# Altium PCB WirelessAudioSpeaker.PcbDoc (part 1 of 2)
Units mm, origin at the board's own origin, x right, y up, seen from the top; angles counter-clockwise.
Board outline 50.68 x 47.13 mm, 2 copper layers (Top Layer, Bottom Layer); 94 components, 57 nets, 349 pads, 621 vias.
Unrouted connection lines stored in the file: 2.
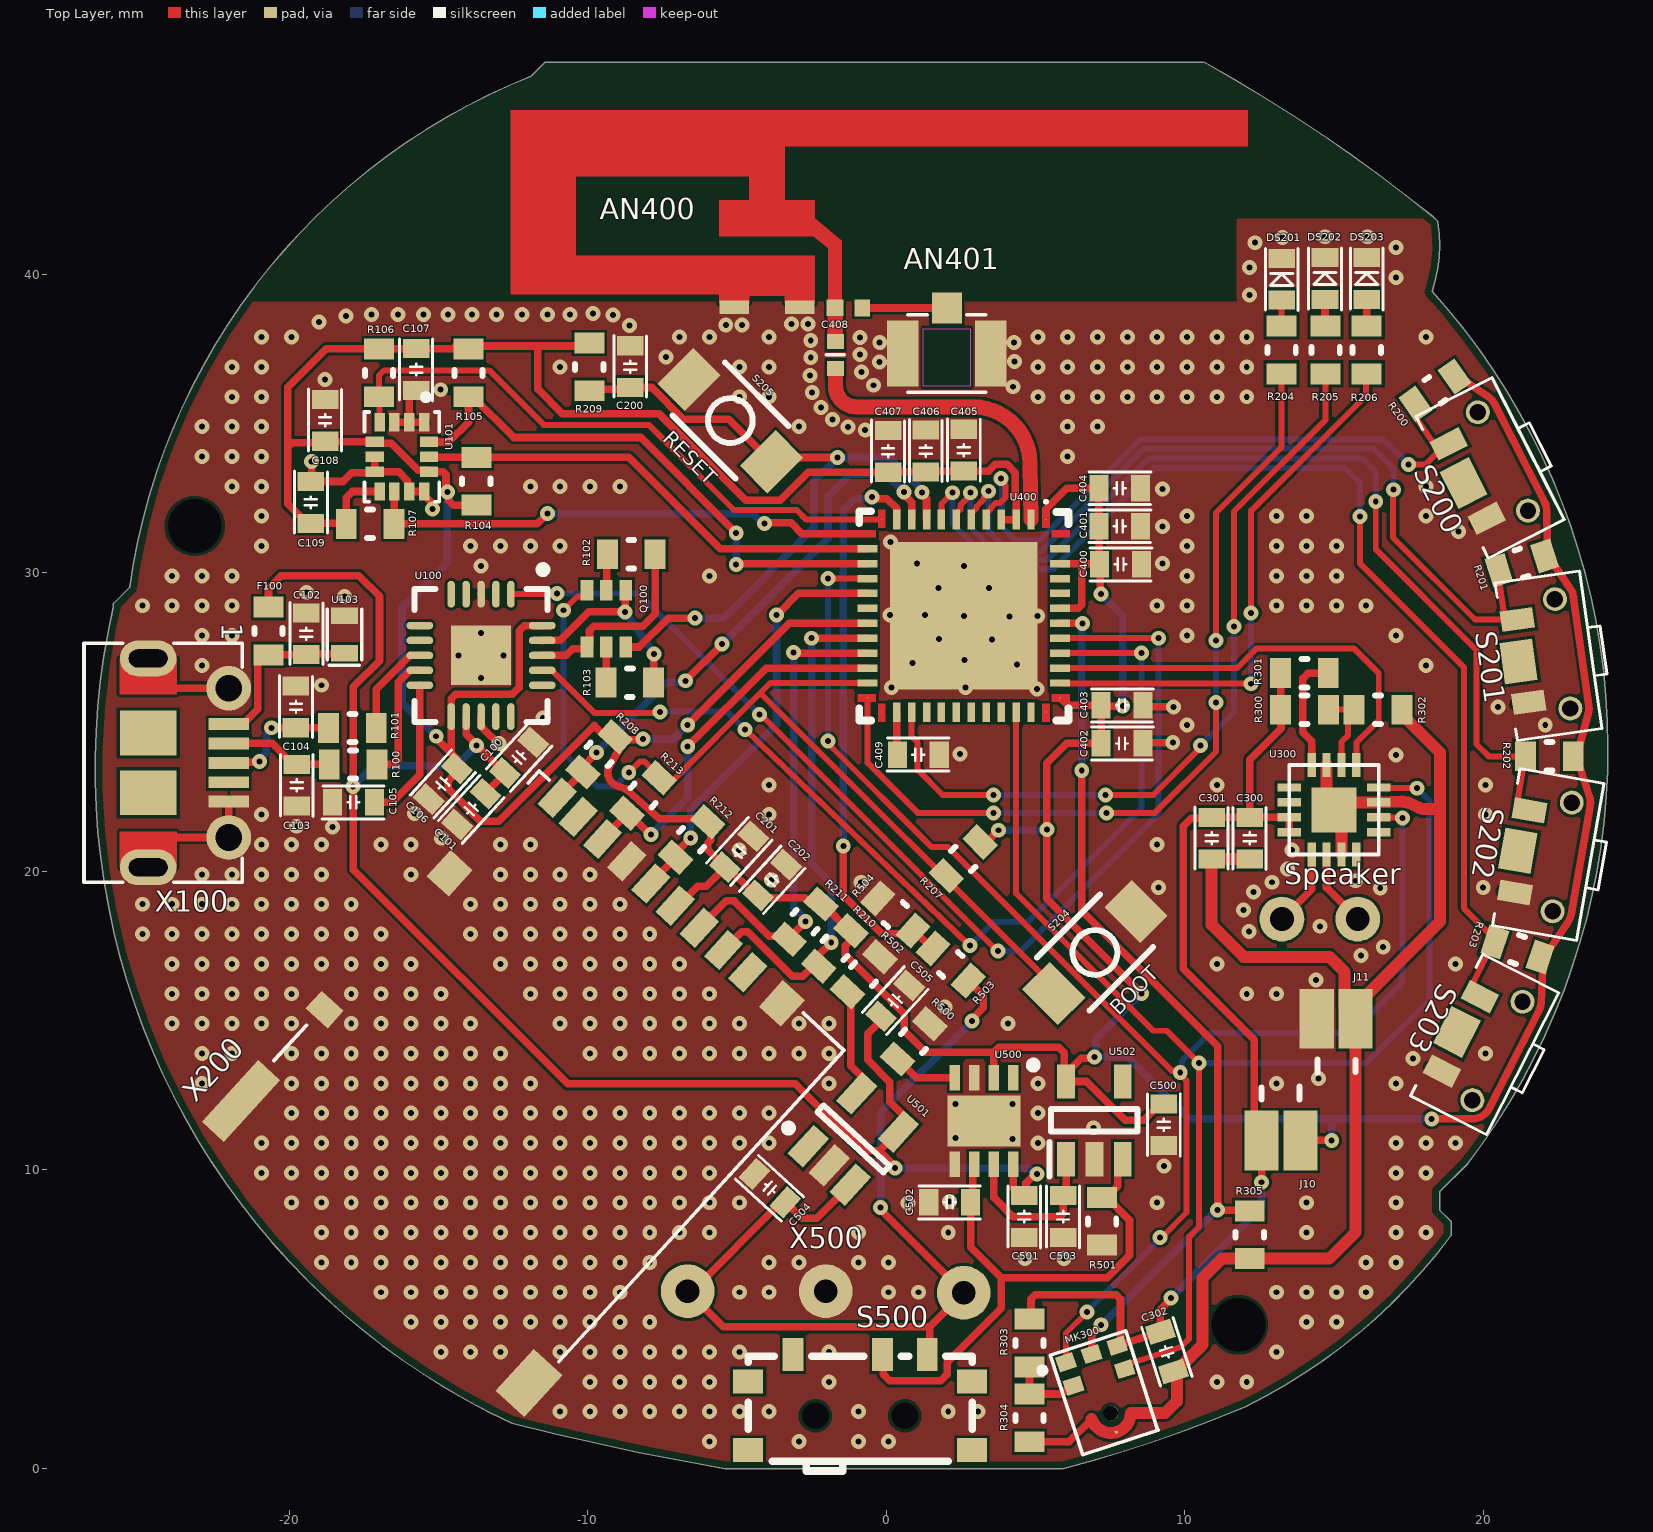
[diagram p0: Top Layer view]
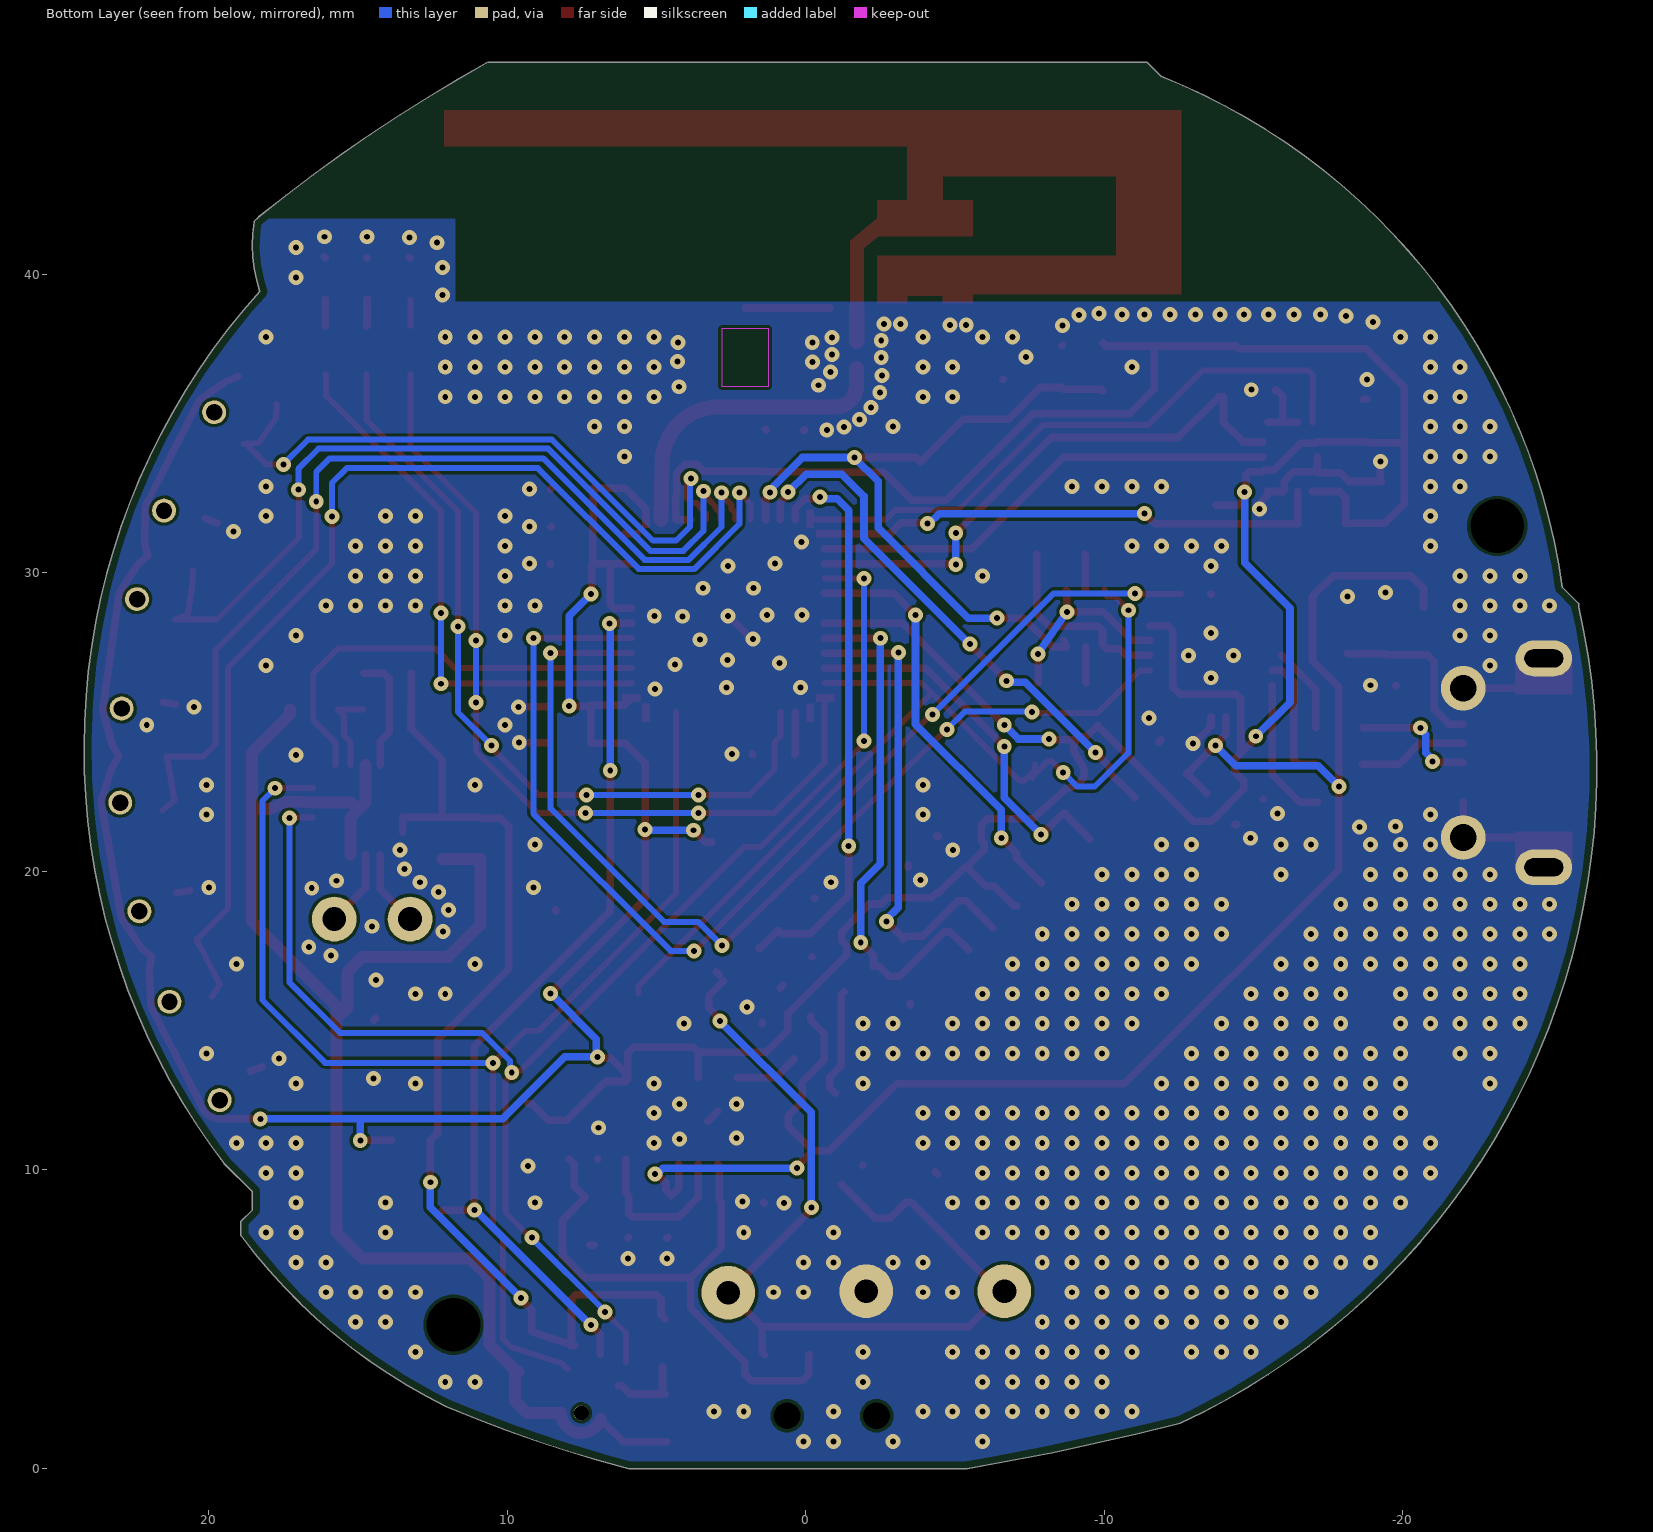
[diagram p1: Bottom Layer view, seen from below]

## Layer stack, top to bottom
Top Solder: solder mask 0.0102, Solder Resist, Dk 3.5
Top Layer: signal copper 0.0356
Dielectric 1: dielectric 0.32, FR-4, Dk 4.8
Bottom Layer: signal copper 0.0356
Bottom Solder: solder mask 0.0102, Solder Resist, Dk 3.5

## Board outline
-12.543,1.496 ccw(c11.581,97.271) -5.4,-0.025 5.926,-0.025 ccw(c-5.542,43.676) 12.038,2.056 ccw(c3.6,19.193) 18.921,7.785 18.921,8.267 18.54,8.648 18.54,9.258 19.48,10.198 ccw(c1.294,24.091) 18.291,39.417 ccw(c13.46,40.982) 18.48,41.747 18.48,41.762 18.327,41.916 ccw(c-15.774,-0.315) 10.641,47.104 -11.423,47.104 -11.906,46.621 ccw(c-3.914,26.504) -25.351,29.502 -25.889,28.964 -25.889,28.846 ccw(c-2.288,23.431)

## Design rules (kind name [scope] priority, off if disabled: settings)
BoardOutlineClearance [All] p1: gap=0.254 ignorepadtopadclearanceinfootprint=FALSE
Clearance [All] p1: gap=0.1 ignorepadtopadclearanceinfootprint=FALSE
HoleSize [All] p1: absolutevalues=TRUE maxlimit=6 minlimit=0.2 maxpercent=80.000 minpercent=20.000
PolygonConnect [All] p1: connectstyle=Direct reliefconductorwidth=0.254 reliefentries=4 polygonreliefangle="90 Angle" airgapwidth=0.254
RoutingVias [All] p1: holewidth=0.2 width=0.5 viastyle="Through Hole" minholewidth=0.2 minwidth=0.4 maxholewidth=0.5 maxwidth=0.7
SilkToSilkClearance [All] p1: silktosilkclearance=0.15
SilkToSolderMaskClearance [IsPad] p1: minsilkscreentomaskgap=0.15 clearancetoexposedcopper=TRUE
SolderMaskExpansion [All] p1: expansion=0.075 istentingtop=FALSE
Width [All] p1: maxlimit=20 minlimit=0.175 preferedwidth=0.254
27 further rules are at their usual default settings.

## Classes and differential pairs
component class U_USB_UART_IMU: C100 C101 C102 C103 C104 C105 C106 C107 C108 C109 F100 Q100 R100 R101 R102 R103 R104 R105 R106 R107 U100 U101 U103 X100
component class SoC: AN400 AN401 C400 C401 C402 C403 C404 C405 C406 C407 C408 C409 U400
component class Power: C500 C501 C502 C503 C504 C505 J10 J11 R500 R501 R502 R503 R504 S500 U500 U501 U502 X500
component class Analog: C300 C301 C302 MK300 R300 R301 R302 R303 R304 R305 Speaker U300
component class IO: C200 C201 C202 DS201 DS202 DS203 R200 R201 R202 R203 R204 R205 R206 R207 R208 R209 R210 R211 R212 R213 S200 S201 S202 S203 S204 S205 X200

## Components (designator, comment, footprint, x,y, rotation, side; value= is the part's Value field where it differs from the comment)
AN400 "PCB-Antenna" ESP32-PCB-Antenna -5.105,38.887 r0 top locked
AN401 "AN-U.FL-R-SMT-1(10)" HRS_U.FL-R-SMT-1(10) 2.032,37.338 r180 top locked
C100 "100nF" C-0603 -12.3,23.8 r227.5 top
C101 "100nF" C-0603 -13.9,22.075 r47.5 top
C102 "100nF" C-0603 -19.425,27.95 r270 top
C103 "100nF" C-0603 -19.75,22.875 r90 top
C104 "100nF" C-0603 -19.775,25.5 r270 top
C105 "100nF" C-0603 -17.85,22.3 r0 top
C106 "100nF" C-0603 -14.85,22.925 r47.5 top
C107 "100nF" C-0603 -15.75,36.8 r90 top
C108 "100nF" C-0603 -18.8,35.1 r270 top
C109 "100nF" C-0603 -19.275,32.35 r270 top
C200 "100nF" C-0603 -8.575,36.9 r270 top
C201 "100nF" C-0603 -4.925,20.65 r227.5 top
C202 "100nF" C-0603 -3.825,19.7 r227.5 top
C300 "100nF" C-0603 12.175,21.1 r90 top
C301 "100nF" C-0603 10.9,21.1 r270 top
C302 "100nF" C-0603 9.4,3.9 r108 top
C400 "100nF" C-0603 7.85,30.275 r180 top
C401 "100nF" C-0603 7.825,31.55 r180 top
C402 "100nF" C-0603 7.9,24.275 r180 top
C403 "100nF" C-0603 7.9,25.55 r180 top
C404 "100nF" C-0603 7.825,32.825 r180 top
C405 "100nF" C-0603 2.6,34.1 r270 top
C406 "100nF" C-0603 1.325,34.075 r270 top
C407 "100nF" C-0603 0.061,34.06 r270 top
C408 "100nF" C-0402 -1.7,37.29 r90 top
C409 "100nF" C-0603 1.075,23.9 r0 top
C500 "100nF" C-0603 9.3,11.5 r90 top
C501 "100nF" C-0603 4.625,8.425 r90 top
C502 "100nF" C-0603 2.125,8.9 r0 top
C503 "100nF" C-0603 5.925,8.425 r90 top
C504 "100nF" C-0603 -3.9,9.375 r317.5 top
C505 "100nF" C-0603 0.3,15.65 r227.5 top
DS201 "150060BS75000" LED-0603-BLUE 13.25,39.825 r90 top value=Blue
DS202 "150060BS75000" LED-0603-BLUE 14.7,39.85 r90 top value=Blue
DS203 "150060BS75000" LED-0603-BLUE 16.1,39.85 r90 top value=Blue
F100 "SF-0603F050-2" SMD-0603 -20.675,28.05 r90 top
J10 "2 way net solder junction - Normally Open" 2waySolder_NO 13.225,10.975 r180 top
J11 "2 way net solder junction - Normally Open" 2waySolder_NO 15.075,15.05 r0 top
MK300 "ICS-43434" MK-ICS-43434 7.3,2.525 r18 top locked
Q100 "BC847BS" SOT-23-6 -9.375,28.457 r270 top
R100 "27E" R-0603 -17.85,23.55 r0 top
R101 "27E" R-0603 -17.875,24.775 r0 top
R102 "27E" R-0603 -8.55,30.632 r180 top
R103 "27E" R-0603 -8.6,26.332 r180 top
R104 "27E" R-0603 -13.75,33.05 r270 top
R105 "27E" R-0603 -13.975,36.7 r90 top
R106 "27E" R-0603 -16.975,36.7 r90 top
R107 "27E" R-0603 -17.3,31.65 r180 top
R200 "27E" R-0603 18.4,36.1 r35 top
R201 "27E" R-0603 21.3,30.3 r17.5 top
R202 "27E" R-0603 22.225,23.825 r0 top
R203 "27E" R-0603 21.15,17.35 r341.5 top
R204 "27E" R-0603 13.225,37.45 r270 top
R205 "27E" R-0603 14.7,37.45 r270 top
R206 "27E" R-0603 16.075,37.45 r270 top
R207 "27E" R-0603 2.6,20.4 r45 top
R208 "27E" R-0603 -9.6,23.9 r47.5 top
R209 "27E" R-0603 -9.925,36.9 r90 top
R210 "27E" R-0603 -1.7,17.4 r47.5 top
R211 "27E" R-0603 -2.7,18.3 r47.5 top
R212 "27E" R-0603 -6.5,21.05 r47.5 top
R213 "27E" R-0603 -8.125,22.525 r47.5 top
R300 "27E" R-0603 14.005,25.425 r180 top
R301 "27E" R-0603 14,26.65 r180 top
R302 "27E" R-0603 16.465,25.425 r180 top
R303 "27E" R-0603 4.82,4.2 r90 top
R304 "27E" R-0603 4.82,1.69 r90 top
R305 "27E" R-0603 12.2,7.825 r90 top
R500 "27E" R-0603 0.9,14.3 r227.5 top
R501 "27E" R-0603 7.25,8.275 r90 top
R502 "27E" R-0603 -0.775,16.55 r227.5 top
R503 "27E" R-0603 2.15,16.85 r317.5 top
R504 "27E" R-0603 0.3,18.525 r317.51 top
S200 "SKTDLDE010" S-SKTDLDE010 20.658,33.722 r117 top locked
S201 "SKTDLDE010" S-SKTDLDE010 22.659,27.277 r98 top locked
S202 "SKTDLDE010" S-SKTDLDE010 22.644,20.472 r80 top locked
S203 "SKTDLDE010" S-SKTDLDE010 20.475,13.975 r63 top locked
S204 "B3U-100P" S-B3U-100X 7,17.275 r45 top
S205 "B3U-100P" S-B3U-100X -5.225,35.1 r135 top
S500 "MLL1200S" S-MLL1200S -0.875,1.75 r0 top locked
Speaker "Speaker" A-Speaker-Connector 14.525,18.392 r0 top locked
U100 "FT231XQ-R" QFN-20-M -13.575,27.225 r270 top
U101 "ICM-40627" LGA-14 -16.225,33.875 r270 top
U103 "ESDA7P120-1U1M" ESD_QFN1610_2N_1K_2A -18.15,27.925 r90 top
U300 "MAX98357A" QFN16-3MM 15,22.05 r270 top
U400 "U-ESP32-PICO-V3" ESP32PICOV3 2.6,28.55 r270 top
U500 "TPS2115ADRBR" SON65P300X300X100-9N-D 3.275,11.625 r270 top
U501 "MCP73832T-2DCI_OT" SOT-23-5 -1.1,11.025 r47.5 top
U502 "AP7347DQ-33W5-7" SOT95P280X145-5N 6.975,11.65 r90 top
X100 "X-MicroUSB" Micro-USB -26.175,23.625 r270 top locked
X200 "X-DM3AT-SF-PEJM5" X-DM3AT-SF-PEJM5 -7,18.775 r317.5 top locked
X500 "Battery" Battery -2.025,5.9 r0 top locked

## Footprints (in the part's own frame and the unit in brackets; to place one, negate y for a bottom-side part, rotate by r counter-clockwise, add the part's x,y. Pads: shape width x height; smd on the part's side, far side on the other; paste and mask are expansions set on the pad)
2waySolder_NO [mm] "2 way net solder junction - Normally Open"
  rect 1.143x2 smd paste-1.016: 1(-0.65,0) 2(0.65,0)
  silkscreen extent -0.62,-1.8 0.65,-1.37
A-Speaker-Connector [mm] "Solderpads for Speaker"
  round 1.5 hole 0.8: 1(-1.27,0) 2(1.27,0)
Battery [mm]
  round 1.8 hole 0.8: 1(-4.627,0.025) 2(-0.002,0.025) 3(4.623,-0.025)
C-0402 [mm]
  rect 0.51x0.56 smd mask+0.05: 1(-0.45,0) 2(0.45,0)
  silkscreen extent 0,-0.3 0,0.3, body extent -0.5,-0.3 0.5,0.3, height 0.4
C-0603 [mm]
  rect 0.64x0.89 smd mask+0.05: 1(-0.7,0) 2(0.7,0)
  silkscreen extent -1.05,-0.55 1.02,0.55, body extent -0.9,-0.5 0.9,0.5, height 1.4
ESD_QFN1610_2N_1K_2A [mm]
  rect 0.55x0.9 smd mask+0.05: 1(-0.625,0) 2(0.625,0)
  silkscreen extent -1.02,-0.58 0.85,0.58, body extent -0.8,-0.49 0.8,0.49, height 0.61
ESP32-PCB-Antenna [mm]
  rect 0.56x0.56 smd mask+0.05: ANT1(3.392,-0.014)
  rect 0.51x0.56 smd mask+0.05: ANT2(4.304,-0.025)
  rect 1x0.46 smd: GND(0.012,0) GND(2.21,0)
  Top Layer region: 3.16,-0.014 3.16,1.974 2.66,2.384 -0.49,2.384 -0.49,3.594 0.51,3.594 0.51,4.394 -5.29,4.394 -5.29,1.724 2.71,1.724 2.71,0.127 1.71,0.127 1.71,0.394 0.51,0.394 0.51,0.127 -0.49,0.127 -0.49,0.434 -7.47,0.434 -7.47,6.604 17.221,6.604 17.221,5.394 1.71,5.394 1.71,3.594 2.71,3.594 2.71,2.984 3.62,2.224 3.62,-0.014
ESP32PICOV3 [mm]
  round 0.025 smd: 1(-3.225,2.75) 12(-3.225,-2.75) 13(-2.75,-3.225) 24(2.75,-3.225) 25(3.225,-2.75) 36(3.225,2.75) 37(2.75,3.225) 48(-2.75,3.225)
  rect 0.66x0.25 smd: 2(-3.225,2.25) 3(-3.225,1.75) 4(-3.225,1.25) 5(-3.225,0.75) 6(-3.225,0.25) 7(-3.225,-0.25) 8(-3.225,-0.75) 9(-3.225,-1.25) 10(-3.225,-1.75) 11(-3.225,-2.25) 26(3.225,-2.25) 27(3.225,-1.75) 28(3.225,-1.25) 29(3.225,-0.75) 30(3.225,-0.25) 31(3.225,0.25) 32(3.225,0.75) 33(3.225,1.25) 34(3.225,1.75) 35(3.225,2.25)
  rect 0.25x0.66 smd: 14(-2.25,-3.225) 15(-1.75,-3.225) 16(-1.25,-3.225) 17(-0.75,-3.225) 18(-0.25,-3.225) 19(0.25,-3.225) 20(0.75,-3.225) 21(1.25,-3.225) 22(1.75,-3.225) 23(2.25,-3.225) 38(2.25,3.225) 39(1.75,3.225) 40(1.25,3.225) 41(0.75,3.225) 42(0.25,3.225) 43(-0.25,3.225) 44(-0.75,3.225) 45(-1.25,3.225) 46(-1.75,3.225) 47(-2.25,3.225)
  rect 4.95x4.95 smd: 49(0,0)
  Top Layer region: -3.555,2.625 -3.555,2.875 -2.946,2.875 -2.946,2.625
  Top Layer region: -3.555,-2.875 -3.555,-2.625 -2.946,-2.625 -2.946,-2.875
  Top Layer region: -2.875,-3.555 -2.875,-2.946 -2.625,-2.946 -2.625,-3.555
  Top Layer region: 2.625,-3.555 2.625,-2.946 2.875,-2.946 2.875,-3.555
  Top Layer region: 2.946,-2.875 2.946,-2.625 3.555,-2.625 3.555,-2.875
  Top Layer region: 2.946,2.625 2.946,2.875 3.555,2.875 3.555,2.625
  Top Layer region: 2.625,2.946 2.625,3.555 2.875,3.555 2.875,2.946
  Top Layer region: -2.875,2.946 -2.875,3.555 -2.625,3.555 -2.625,2.946
  silkscreen extent -3.87,-3.51 3.51,3.51, body extent -3.5,-3.5 3.5,3.5, height 1.14
HRS_U.FL-R-SMT-1(10) [mm]
  rect 1.05x2.2 smd: 1(-1.475,0) 3(1.475,0)
  rect 1x1.05 smd: 2(0,-1.525)
  Keep-Out Layer region: 0.787,-0.838 -0.787,-0.838 -0.787,1.1 0.787,1.1
  silkscreen extent -1.3,-1.3 1.3,1.3, body extent -1.47,-1.52 1.53,1.58, height 1.26
LED-0603-BLUE [mm]
  rect 0.64x0.89 smd mask+0.05: A(-0.7,0) K(0.7,0)
  silkscreen extent -1.05,-0.55 1.03,0.55, body extent -0.8,-0.4 0.8,0.4, height 0.4
LGA-14 [mm]
  rect 0.61x0.35 smd: 1(-1.16,0.75) 2(-1.16,0.25) 3(-1.16,-0.25) 4(-1.16,-0.75) 8(1.16,-0.75) 9(1.16,-0.25) 10(1.16,0.25) 11(1.16,0.75)
  rect 0.35x0.61 smd: 5(-0.5,-0.91) 6(0,-0.91) 7(0.5,-0.91) 12(0.5,0.91) 13(0,0.91) 14(-0.5,0.91)
  silkscreen extent -2.1,-1.25 1.5,1.25, body extent -1.5,-1.25 1.5,1.25, height 0.95
Micro-USB [mm]
  rect 0.4x1.35 smd mask+0.05: 1(-1.3,4.15) 2(-0.65,4.15) 3(0,4.15) 4(0.65,4.15) 5(1.3,4.15)
  round 1.5 hole 0.9 mask+0.05: 6(-2.5,4.15) 7(2.5,4.15)
  oval 1.2x1.9 hole 0.6 slot 1.3 at 90 deg mask+0.05: 8(3.5,1.45) 9(-3.5,1.45)
  rect 1.5x1.9 smd mask+0.05: 10(-1,1.45) 11(1,1.45)
  Top Layer region: -3.5,2.4 -2.3,2.4 -2.3,0.5 -3.5,0.5 -3.5,2.4
  Top Layer region: 2.3,2.4 3.5,2.4 3.5,0.5 2.3,0.5 2.3,2.4
  silkscreen extent -4,-0.7 4,4.6, body extent -4.1,-1.15 4.1,4.66, height 2.9
MK-ICS-43434 [mm]
  rect 0.6x0.522 smd paste-1: 1(-0.9,1.361) 2(-0.9,0.539) 4(0.9,0.539) 5(0.9,1.361) 6(0,1.361)
  rect 0.1x0.1 smd paste-1 mask+0: 3(-0.016,-1.383)
  round 0.5 hole 0.5 unplated: ""(0,-0.713)
  Top Layer lines w0.4: -0.671,-0.711 ccw(c0,-0.713) 0.638,-0.92
  silkscreen extent -1.84,-1.75 1.33,1.75, body extent -1.22,-1.79 1.19,1.79, height 0.4
QFN16-3MM [mil] "QFN16_3MM"
  rect 31.5x11.02 smd mask-15.75: 1(-59.06,29.53) 2(-59.06,9.84) 3(-59.06,-9.84) 4(-59.06,-29.53) 9(59.06,-29.53) 10(59.06,-9.84) 11(59.06,9.84) 12(59.06,29.53)
  rect 11.02x31.5 smd mask-15.75: 5(-29.53,-59.06) 6(-9.84,-59.06) 7(9.84,-59.06) 8(29.53,-59.06) 13(29.53,59.06) 14(9.84,59.06) 15(-9.84,59.06) 16(-29.53,59.06)
  rect 59.06x59.06 smd paste-29.53: THERMAL(0,0)
  silkscreen extent -59,-59 59,59, body extent -59,-59 59,59, height 35
QFN-20-M [mm] "QFN, 20-Leads, Body 4x4mm, Pitch 0.5mm, Thermal Pad 2x2mm, IPC Medium Density"
  oval 0.9x0.25 smd: 1(-2.05,1) 2(-2.05,0.5) 3(-2.05,0) 4(-2.05,-0.5) 5(-2.05,-1) 11(2.05,-1) 12(2.05,-0.5) 13(2.05,0) 14(2.05,0.5) 15(2.05,1)
  oval 0.25x0.9 smd: 6(-1,-2.05) 7(-0.5,-2.05) 8(0,-2.05) 9(0.5,-2.05) 10(1,-2.05) 16(1,2.05) 17(0.5,2.05) 18(0,2.05) 19(-0.5,2.05) 20(-1,2.05)
  rect 2x2 smd paste-1: 21(0,0)
  silkscreen extent -3,-2.22 2.22,2.23, body extent -2.08,-2.07 2.07,2.08, height 0.8
R-0603 [mm]
  rect 0.7x1 smd: 1(-0.809,0.019) 2(0.791,0.019)
  silkscreen extent -0.11,-0.46 0.09,0.49, body extent -0.88,-0.46 0.87,0.49, height 0.54
S-B3U-100X [mm]
  rect 1.3x1.7 smd: 1(-1.958,0.004) 2(1.942,0.004)
  silkscreen extent -1.51,-1.25 1.49,1.25, body extent -2.01,-1.25 1.99,1.25, height 1.61
S-MLL1200S [mm]
  rect 1x0.8 smd: 0(-3.75,-1.15) 0(-3.75,1.15) 0(3.75,-1.15) 0(3.75,1.15)
  round 0 hole 0.9: 0(-1.5,0) 0(1.5,0)
  rect 0.7x1.1 smd: 1(-2.25,2.05) 2(0.75,2.05) 3(2.25,2.05)
  silkscreen extent -3.75,-1.85 3.75,2, body extent -3.85,-2.85 3.85,2.25, height 1.5
S-SKTDLDE010 [mm]
  round 0.8 hole 0.55: 0(-1.85,-0.002) 0(1.85,-0.002)
  rect 0.7x1.1 smd: 1(-1.45,1.348) 2(1.35,1.348)
  rect 1.4x1.1 smd: 3(-0.05,1.498)
  silkscreen extent -2.67,-1.38 2.67,1.91, body extent -2.16,-0.89 2.03,2.03, height 1.55
SMD-0603 [mm]
  rect 0.7x1 smd: 1(-0.809,0.019) 2(0.791,0.019)
  silkscreen extent -0.11,-0.46 0.09,0.49, body extent -0.88,-0.46 0.87,0.49, height 0.54
SON65P300X300X100-9N-D [mm]
  rect 0.85x0.35 smd: 1(-1.45,0.975) 2(-1.45,0.325) 3(-1.45,-0.325) 4(-1.45,-0.975) 5(1.45,-0.975) 6(1.45,-0.325) 7(1.45,0.325) 8(1.45,0.975)
  rect 1.7x2.45 smd: 9(0,0)
  silkscreen extent -2,1.53 -1.75,1.78, body extent -1.5,-1.5 1.5,1.5, height 0.77
SOT95P280X145-5N [mm]
  rect 1.15x0.6 smd: 1(-1.3,0.95) 2(-1.3,0) 3(-1.3,-0.95) 4(1.3,-0.95) 5(1.3,0.95)
  silkscreen extent -1.88,-1.45 0.38,1.5, body extent -1.4,-1.45 1.4,1.45, height 1.45
SOT-23-5 [mm] "MCP73831"
  rect 1.3x0.7 smd: 1(-1.2,0.95) 2(-1.2,0) 3(-1.2,-0.95) 4(1.2,-0.95) 5(1.2,0.95)
  silkscreen extent -1.32,-1.5 0.15,1.97, body extent -1.6,-1.5 1.6,1.5, height 0.92
SOT-23-6 [mm]
  rect 0.7x0.42 smd: 1(-0.95,0.65) 2(-0.95,0) 3(-0.95,-0.65) 4(0.95,-0.65) 5(0.95,0) 6(0.95,0.65)
  body extent -1.2,-1.1 1.2,1.1, height 1.1
X-DM3AT-SF-PEJM5 [mm] "MicroUSB"
  rect 0.7x1.2 smd: 1(3.2,0) 2(2.1,0) 3(1,0) 4(-0.1,0) 5(-1.2,0) 6(-2.3,0) 7(-3.4,0) 8(-4.5,0) 9(-5.45,0)
  rect 1x0.8 smd: 10(-6.4,-10.5)
  rect 1x1.2 smd: S(-6.4,-4.3) S(4.75,0)
  rect 1x2.8 smd: S(-6.4,-14.65)
  rect 1.3x1.9 smd: S(7.1,-15.1)
  silkscreen extent -6.5,-13.9 7.35,0.25, body extent -6.54,-15.9 7.31,0.25, height 1.68

## Part data
AN400: library part AN-ESP32-PCB-Antenna, "PCB, 2.4 GHz Antenna", Manufacturer=BFH, Added=28.08.2018, ComponentLink1Description="Antenna for ESP32", Order_Code="PCB 2.4 GHz Antenna", Part-Number="PCB 2.4 GHz Antenna", Price (CHF)=0.0
AN401: "U.FL _UMCC_ Connector Receptacle, Male Pin 50Ohm Surface Mount Solder", Manufacturer=Hirose, Mfr. Part No.=U.FL-R-SMT-1(10), Package=None, Distributor=Mouser, Order-Code=798-U.FL-R-SMT-110, SnapEDA_Link=https://www.snapeda.com/parts/U.FL-R-SMT-1%2810%29/Hirose%20Electric%20Co%20Ltd/view-part/55192/?ref=snap
C100 C101 C102 C103 C104 C105 C106 C107 C108 C109 C200 C201 C202 C300 C301 C302 C400 C401 C402 C403 C404 C405 C406 C407 C409 C500 C501 C502 C503 C504 C505: library part C-SMD-0603, "Multilayer Ceramic Capacitors MLCC", Manufacturer="Murata Electronics", Mfr. Part No.=GRM18..., Package=0603, Added=28.08.2018, ComponentLink1Description="Chip Multilayer Ceramic Capacitors", ComponentLink1URL=https://www.mouser.ch/datasheet/2/281/murata_03052018_GRM_Series_1-1310166.pdf, Distributor=Mouser, Mounting Style=SMD/SMT, Notice=-, Order-Code=81-GRM18..., Price (CHF)=0.12
C408: library part C-SMD-0402, "Multilayer Ceramic Capacitors MLCC", Manufacturer="Murata Electronics", Mfr. Part No.=GRM02*, Package=0402, Added=28.08.2018, ComponentLink1Description="Chip Multilayer Ceramic Capacitors", ComponentLink1URL=https://www.mouser.ch/datasheet/2/281/murata_03052018_GRM_Series_1-1310166.pdf, Distributor=Mouser, Mounting Style=SMD/SMT, Notice=-, Order-Code=81-GRM02..., Price (CHF)=0.12
DS201 DS202 DS203: library part DS-LED-BLUE, "Standard LEDs - SMD 0603 Blue", Manufacturer="Wurth Elektronik", Package=0603, Added=06.08.2021, Distributor=Mouser, Mfr. Part No.=150060BS75000, Mounting Style=SMD/SMT, Notice=-, Order-Code=710-150060BS75000, Price (CHF)=0.105
F100: library part F-0603F050-2, "Surface Mount Fuses 0.5A Fast Acting", Manufacturer=Bourns, Package=0603, Added=02.02.2017, ComponentLink1Description="Mouser Datasheet", ComponentLink1URL=https://www.mouser.ch/datasheet/2/54/f0603f-778085.pdf, Distributor=Mouser, Mfr. Part No.=SF-0603F050-2, Mounting Style=SMD/SMT, Notice=-, Order-Code=652-SF-0603F050-2, Price (CHF)=0.542
J10 J11: library part 2waySolderNO, ComponentLink1Description=Source, ComponentLink1URL=http://www.edatools.cz/addons
MK300: library part MK-ICS-43434, "Microphone MEMS / 60Hz ~ 20kHz Digital, I²S", Manufacturer="TDK InvenSense", Added=16.09.2020, Distributor=Mouser, Mfr. Part No.=ICS-43434, Mounting Style=SMD/SMT, Notice=-, Order-Code=410-ICS-43434, Pckage=SMD/SMT, Price (CHF)=2.64
Q100: library part Q-BC847BS, "Bipolares Transistor-Array, Universal, NPN, 45 V, 250 mW, 100 mA, 200 hFE, SC-88", Manufacturer="Diodes Incorporated", Mfr. Part No.=BC847BS-7-F, Package=SOT-23-6, Added=28.08.2018, ComponentLink1Description="DUAL NPN SMALL SIGNAL SURFACE MOUNT TRANSISTOR", ComponentLink1URL=https://www.mouser.ch/datasheet/2/115/ds30222-71055.pdf, Distributor=Mouser, Mounting Style=SMD/SMT, Notice=-, Order-Code=621-BC847BS-7-F, Price (CHF)=0.23
R100 R101 R102 R103 R104 R105 R106 R107 R200 R201 R202 R203 R204 R205 R206 R207 R208 R209 R210 R211 R212 R213 R300 R301 R302 R303 R304 R305 R500 R501 R502 R503 R504: library part R-SMD-0603, "Thin Film Resistors - SMD  0.1W  1%", Manufacturer="Vishay / Beyschlag", Mfr. Part No.=MCU08050C*, Package=0603, Added=10.11.2012, Distributor=Mouser, Mounting Style=SMD/SMT, Notice=-, Order-Code=BFH-Lager, Price (CHF)=0.1
S200 S201 S202 S203: library part S-Tactile-Switch, "Tactile Switches 6x6 Flat 4.3mm Btn Force 100g w/o Grd", Manufacturer=ALPS, Package="LxWxH 3.9x2.9x1.55mm", Added=28.08.2018, ComponentLink1Description="Tactile Switch", ComponentLink1URL=http://www.farnell.com/datasheets/2082873.pdf?_ga=2.143512053.1712594784.1535524557-997716388.1524486210, Distributor=Mouser, Mfr. Part No.=SKTDLDE010, Mounting Style=SMD/SMT, Notice=-, Order-Code=688-SKTDLDE010, Price (CHF)=0.43
S204 S205: library part S-B3U-100P, "Tactile Switches Top Actuated w/o boss w/o ground", Manufacturer="OMRON ELECTRONIC COMPONENTS", Mfr. Part No.=B3U-1000P, Package=2.5x3mm, Added=28.08.2018, ComponentLink1Description="Ultra-small Tactile Switch (SMT)", ComponentLink1URL=http://www.farnell.com/datasheets/2610940.pdf?_ga=2.224737754.1712594784.1535524557-997716388.1524486210, Distributor=Mouser, Mounting Style=SMD/SMT, Notice=-, Order-Code=653-B3U-1000P, Price (CHF)=0.772
S500: library part S-Slide-Switch, "Slide Switch SPDT RA SMT MLL1200S", Manufacturer="TE Connectivity", Package=SMD/SMT, Added=08.10.2018, Datasheet Link=https://www.te.com/commerce/DocumentDelivery/DDEController?Action=srchrtrv&DocNm=1437575-1&DocType=Customer+Drawing&DocLang=English&DocFormat=pdf&PartCntxt=1437575-1, Distributor=Mouser, Mfr. Part. Nr.=MLL1200S, Mounting Style=SMD/SMT, Notice=-, Order-Code=506-MLL1200S, Price (CHF)=2.27
Speaker: library part A_Speaker, "Speaker, 3W 8 Ohm"
U100: library part U-FT231XQ-R, "USB Interface IC USB to Full Serial UART", Package=QFN-20, Added=10.08.2021, Code_JEDEC=MO-220WGGD-1, ComponentLink1Description="Manufacturer URL", ComponentLink1URL=http://www.ftdichip.com/, ComponentLink2Description=Datasheet, ComponentLink2URL=http://www.ftdichip.com/Support/Documents/DataSheets/ICs/DS_FT231X.pdf, ComponentLink3Description="FT231X Product Page", ComponentLink3URL=www.ftdichip.com/Products/ICs/FT231X.html, DatasheetVersion="ver 1.0, Feb-2012", Distributor=Mouser, Mfr. Part No.=FT231XQ-R, Mounting Style=SMD/SMT, Notice=-, Order-Code=895-FT231XQ-R, PackageDescription="20-Pin Quad Flat No-Lead, 4 x 4 mm Body, 0.5 mm Pitch", PackageReference=QFN-20, PackageVersion=Feb-2012
U101: library part U-ICM-40627, "IMUs - Inertial Measurement Units Highly accurate MEMS based motion sensor", Manufacturer="TDK InvenSense", Package=LGA-14, Added=06.08.2021, Distributor=Mouser, Mfr. Part No.=ICM-40627, Mounting Style=SMD/SMT, Notice=-, Order-Code=410-ICM-40627, Price (CHF)=3.58
U103: library part U-ESDA7P120-1U1M, "5V High power transient voltage suppressor", Manufacturer=STMicroelectronics, Package=ESD_QFN1610_2N_1K_2A, Added=07.08.2021, Distributor=Mouser, Mfr. Part No.=ESDA7P120-1U1M, Mounting Style=SMD, Notice=-, Order-Code=511-ESDA7P120-1U1M, Price (CHF)=0.139
U300: library part U-MAX98357A, "Tiny, Low-Cost, PCM Class D Amplifier", Manufacturer="Maxim Integrated", Mfr. Part No.=MAX98357AETE+T, Package=QFN16, Added=28.08.2018, ComponentLink1Description="Low-Cost, PCM Class D Amplifier", ComponentLink1URL=https://www.mouser.ch/datasheet/2/256/MAX98357A-MAX98357B-271244.pdf, Distributor=Mouser, Mounting Style=SMD/SMT, Notice=-, Order-Code=700-MAX98357AETE+T, Part-Number=MAX98357AETE+T, Price (CHF)=2.03
U400: library part U-ESP32-PICO-V3-BFH, "RF System on a Chip", Manufacturer=Espressif, Manufacturer_Name="Espressif Systems", Manufacturer_Part_Number=ESP32-PICO-V3, Mfr. Part No.=ESP32-PICO-V3-02, Mouser Part Number=356-ESP32-PICO-V3, Package=ESP32PICOV3, Added=08.08.2021, Datasheet Link=https://kr.mouser.com/datasheet/2/891/esp32-pico-v3_datasheet_en-1842685.pdf, Distributor=Mouser, Height=1.04mm, Mountig Style=SMD/SMT, Mouser Price/Stock=https://www.mouser.co.uk/ProductDetail/Espressif-Systems/ESP32-PICO-V3?qs=GBLSl2Akirs311o8knsnZA%3D%3D, Notice=-, Order-Code=356-ESP32-PICO-V3-02, Price (CHF)=3.20
U500: "Power Supply", Manufacturer_Name="Texas Instruments", Mouser Part Number=595-TPS2115ADRBR, Arrow Part Number=TPS2115ADRBR, Arrow Price/Stock=https://www.arrow.com/en/products/tps2115adrbr/texas-instruments?region=nac, Datasheet Link=http://www.ti.com/lit/gpn/tps2115a, Height=1mm, Manufacturer_Part_Number=TPS2115ADRBR, Mouser Price/Stock=https://www.mouser.co.uk/ProductDetail/Texas-Instruments/TPS2115ADRBR?qs=g%2FrhRe7LVpSXEuLZV5FMOQ%3D%3D
U501: "Integrated Circuit", Arrow Part Number=MCP73832T-2DCI/OT, Manufacturer_Name=Microchip, Mouser Part Number=579-MCP73832T-2DCIOT, Arrow Price/Stock=https://www.arrow.com/en/products/mcp73832t-2dciot/microchip-technology?region=nac, Datasheet Link=http://ww1.microchip.com/downloads/en/DeviceDoc/20001984g.pdf, Height=1.45mm, Manufacturer_Part_Number=MCP73832T-2DCI/OT, Mouser Price/Stock=https://www.mouser.co.uk/ProductDetail/Microchip-Technology/MCP73832T-2DCI-OT?qs=yUQqVecv4quyMtCX903Btw%3D%3D
U502: "Integrated Circuit", Manufacturer_Name="Diodes Inc.", Mouser Part Number=621-AP7347DQ-33W5-7, Arrow Part Number=AP7347DQ-33W5-7, Arrow Price/Stock=https://www.arrow.com/en/products/ap7347dq-33w5-7/diodes-incorporated?region=nac, Datasheet Link=https://ad.componentsearchengine.com/partRequest.html?fs=0&partNumber=AP7347DQ-33W5-7&partID=15420390&lang=null&packageCategoryID=54&C=1&W=1, Height=1.45mm, Manufacturer_Part_Number=AP7347DQ-33W5-7, Mouser Price/Stock=https://www.mouser.co.uk/ProductDetail/Diodes-Incorporated/AP7347DQ-33W5-7?qs=XAiT9M5g4x%252B4DeOtxqD2uw%3D%3D
X100: "USB-Stecker MICRO USB B", Manufacturer=Molex, Mfr. Part No.=105017-0001, Package=MicroUSB, Added=10.08.2021, Distributor=Mouser, Mounting Style=SMD/SMT, Order-Code=538-105017-0001, Price (CHF)=0.523
X200: "SMTMicro SD 8 Pin PCB", Manufacturer="Hirose Electric Co Ltd", Mfr. Part No.=DM3AT-SF-PEJM5, Added=08.08.2021, Distributor=Mouser, Mounting Style=SMD/SMT, Notice=-, Order-Code=798-DM3AT-SF-PEJM5, Package=DM3AT-SF-PEJM5, Price (CHF)=1.8
X500: library part X-Battery, "Battery  connection pads", Manufacturer=-, Added=10.08.2021, Mfr. Part No.=-, Mounting Style="Through Hole", Notice=-, Order-Code=-, Package=-, Price (CHF)=-, Provider=-

## Free pads (board coordinates)
  round 0 hole 1.8: 0(-23.167,31.559) 0(11.8,4.8)

## Via types
v1: diameter 0.5, hole 0.2, Top Layer to Bottom Layer, tented both sides, 621 vias

## Nets (pads, with @x,y where several pads share a name; then routed paths per layer and width w, separated by ;. In a path a pad name is that pad's centre, name@x,y a point inside that pad or via, vN(x,y) a via of type N, cw(c..) or ccw(c..) an arc to the next point about the centre after c; other vN are vias at no path point)
3V3: C106.2 C107.2 C108.2 C109.2 C201.2 C202.2 C400.2 C401.2 C402.2 C403.2 C404.2 C405.2 C406.2 C407.2 C500.2 J10.1 R104.2 R105.2 R106.2 R107.2 R200.2 R201.2 R202.2 R203.2 R207.2 R208.2 R209.2 R210.2 R211.2 R212.2 U100.11 U100.20 U101.5 U101.8 U101.12 U400.1 U400.3 U400.4 U400.19 U400.37 U400.43 U400.46 U500.2 U502.5 X200.4 | length 192.5
  Top Layer w0.254: U101.8 -17.885,32.715 -18.091,32.509 R107.2 -18.11,31.65 C109.2 -19.4,31.65 -20.05,32.3 -20.05,34.201 ; v1@-15.125,24.5 -14.575,23.95 ; R104.2 -14.504,32.259 -14.653,32.407 -14.653,32.653 v1(-14.7,32.7) -14.747,32.747 -14.747,33.273 -14.849,33.375 U101.12 -15.363,33.423 -15.673,33.423 -16.577,34.327 -17.087,34.327 U101.5 -17.147,34.388 -18.787,34.388 C108.2 -18.85,34.35 -19.901,34.35 -20.05,34.201 ; U100.20 -11.527,28.223 -12.127,28.223 -12.3,28.05 -12.3,26.15 -12.525,25.925 -14.424,25.925 -14.573,25.776 -14.573,25.177 U100.11 -14.575,23.95 ; R209.2 -10.044,37.591 -11.675,37.591 ; R208.2@-9.043,24.375 -8.955,24.08 -9.266,23.536 ccw(c-8.851,23.3) -8.935,22.83 -8.732,22.748 cw(c-8.817,22.538) -8.666,22.706 -7.598,21.748 -6.081,21.748 R212.2 -5.878,21.545 -5.878,21.027 -5.979,20.926 -5.979,20.715 C201.2 -6.034,19.498 -6.321,19.498 -6.976,18.843 X200.4 ; v1(-8.15,24.425) -8.18,24.395 -8.978,24.395 R208.2 -9.396,24.496 -9.775,24.875 -12.975,21.675 -13.6,21.675 -14.675,22.75 -14.675,23.025 -14.377,23.323 C106.2 -14.377,23.741 -14.575,23.939 -14.575,23.95 ; v1(-6.65,24.9) -3.25,28.3 U400.19 ; C201.2@-5.323,20.134 -4.457,19.268 -4.382,19.268 C202.2 -4.213,19.099 -2.728,19.099 -2.525,18.896 R211.2 -2.129,18.896 -1.202,17.969 -1.202,17.673 -1.375,17.5 -1.375,17.2 0.598,15.227 0.598,14.652 1.325,13.925 3.6,13.925 ; C407.2 -2.615,33.36 -3.55,32.425 -4.712,32.425 -7.613,35.325 -10.85,35.325 -11.675,36.15 -11.675,37.591 ; C407.2@0.076,33.375 C406.2 1.338,33.387 2.587,33.387 C405.2 3.425,33.4 3.652,33.627 4.048,33.627 4.327,33.348 4.327,32.586 4.35,32.563 U400.3 U400.4 ; R207.2 3.364,20.973 v1(3.758,21.367) ; U500.2 3.6,13.925 ; U400.1 5.35,32.125 6.05,32.825 C404.2 C401.2 7.137,31.538 7.137,30.288 C400.2 7.175,30.25 7.175,29.3 v1(7.2,29.275) ; U400.37 6.075,25.55 C403.2 ; U400.43 5.827,28.802 6.427,28.802 6.55,28.925 6.55,30.237 6.613,30.3 ; U400.46 6.613,30.3 ; v1(6.975,13.775) 6.928,13.728 6.528,13.728 6.025,13.225 U502.5 ; C400.2@7.125,30.3 6.613,30.3 ; v1(7.925,25.525) 7.225,25.525 C403.2 ; v1(8.55,15.9) 5.379,19.071 5.379,23.604 6.05,24.275 C402.2 C403.2 ; C500.2 9.175,12.2 8.625,11.65 8.006,11.65 6.706,12.95 U502.5 ; J10.1 v1(14.925,10.975) ; v1(18.275,11.7) 19.636,11.699 ccw(c19.637,12.326) 20.196,12.041 21.875,15.338 ccw(c21.317,15.622) 21.943,15.59 22,16.692 R203.2 22.236,17.4 22.844,18.299 ccw(c22.325,18.65) 22.942,18.541 23.585,22.185 ccw(c22.967,22.294) 23.563,22.49 23.239,23.471 R202.2 23.239,24.217 23.524,25.284 ccw(c22.918,25.445) 23.539,25.532 23.024,29.196 ccw(c22.403,29.109) 22.922,29.462 22.374,30.267 R201.2 22.15,30.979 22.127,32.088 ccw(c21.5,32.075) 22.059,32.36 20.379,35.656 ccw(c19.82,35.372) 20.169,35.893 19.434,36.392 R200.2 ; -20.05,34.201 -20.05,36.2 -18.754,37.496 -15.754,37.496 C107.2 -15.746,37.496 -14.523,37.496 -14.519,37.491 -14.419,37.591 -11.675,37.591 ; 3.6,13.925 3.775,14.1 5.775,14.1 5.969,13.906 5.969,13.006 U502.5
  Bottom Layer w0.254: v1(-15.076,24.516) -16.223,25.663 -16.223,28.802 -14.7,30.325 v1(-14.7,32.7) ; v1(-8.15,24.425) -7.125,24.425 v1(-6.65,24.9) ; v1(3.758,21.367) 5.392,21.367 v1@5.4,21.375 ; v1(7.2,29.275) 7.925,28.55 v1(7.925,25.525) ; v1(8.55,15.9) 7.022,14.372 7.022,13.822 v1(6.975,13.775) 8.075,13.775 10.15,11.7 14.925,11.7 ; v1(14.925,10.975) 14.925,11.7 ; v1(18.275,11.7) 14.925,11.7
  other v1: 5.379,21.388
A_Vcc: C300.2 C301.1 C302.2 J10.2 MK300.5 R300.2 R301.2 R303.2 U300.7 U300.8 | length 35.8
  Top Layer w0.254: R303.2@4.701,4.991 4.85,5.14 4.85,5.66 4.999,5.808 7.699,5.808 7.847,5.66 MK300.5@7.847,4.133 ; MK300.5 MK300.5@7.847,4.133 ; MK300.5@7.847,4.098 MK300.5@7.847,4.133 ; v1@9.55,5.675 9.184,5.309 C302.2 8.881,4.468 7.9,4.149 MK300.5@7.847,4.133 ; v1(12.575,9.575) J10.2 12.333,11.217 12.333,14.342 9.95,16.725 9.95,21.5 10.223,21.773 10.873,21.773 C301.1 C300.2 ; R301.2 13.211,26.629 13.211,25.408 R300.2 13.225,25.395 13.225,24.775 12.175,23.725 C300.2 ; U300.8 U300.7 C300.2
  Bottom Layer w0.254: v1(9.533,5.692) 12.581,8.74 12.581,9.569 v1(12.575,9.575)
AGND: C300.1 C301.2 C302.1 J11.2 MK300.3 R302.1 R304.1 R305.1 U300.3 U300.11 U300.15 U300.THERMAL | length 51.1
  Top Layer w0.254: R304.1@4.651,0.881 R304.1 6.122,0.881 6.882,1.641
  Top Layer w0.4: 8.191,1.847 9.347,1.847 9.734,2.234 9.734,3.116 C302.1 9.697,3.234 10.6,4.138 10.6,6.375 11.241,7.016 R305.1 14.841,7.016 15.725,7.9 J11.2 ; C300.1 C301.2 10.9,18.2 11.975,17.125 14.85,17.125 15.353,16.622 15.353,15.422 J11.2 ; U300.3 14.75,22.3 U300.THERMAL ; U300.11 15.25,21.8 U300.THERMAL ; R302.1 17.274,25.256 18.55,23.98 18.55,22.075 ; U300.THERMAL 15.25,22.3 U300.15 17.283,22.325 cw(c17.3,21.775) 17.536,22.272 17.869,22.114 ccw(c18.04,22.475) 18.04,22.075 18.55,22.075 ; J11.2 15.725,15.479 18.55,18.304 18.55,22.075
Antenna: C408.1 U400.2 | length 10.5
  Top Layer w0.508: C408.1 -1.7,36.25 ccw(c-1,36.25) -1,35.55 2.912,35.55 cw(c2.912,33.646) 4.816,33.65 4.816,33.648 ccw(c5.324,33.651) 4.816,33.639 U400.2
CLK: R212.1 U400.17 X200.5 | length 14.1
  Top Layer w0.254: X200.5 -7.885,19.601 -7.06,20.426 R212.1 -7.06,20.602 v1(-6.55,21.113) ; v1(-3.675,28.575) -2.95,29.3 U400.17
  Bottom Layer w0.254: v1(-6.55,21.113) -6.55,22.049 -3.675,24.924 v1(-3.675,28.575)
CS: R210.1 U400.20 X200.2 | length 17.5
  Top Layer w0.254: X200.2 -4.847,17.961 -4.636,17.961 -3.15,16.475 -2.8,16.475 -2.458,16.817 R210.1 -2.27,16.826 -2.27,17.172 v1(-1.841,17.6) ; v1(-2.5,27.8) U400.20
  Bottom Layer w0.254: v1(-2.5,27.8) -2.5,20.25 -1.841,19.591 v1(-1.841,17.6)
DM: C103.2 R100.1 X100.2 | length 3.7
  Top Layer w0.254: X100.2 -20.575,24.275 -19.875,23.575 C103.2 -18.665,23.575 R100.1
DP: C104.2 R101.1 X100.3 | length 4.3
  Top Layer w0.254: X100.3 -22,23.65 -21.025,23.65 v1(-21,23.675) ; v1(-20.6,24.8) C104.2@-19.777,24.8 ; C104.2 -18.69,24.8 R101.1
  Bottom Layer w0.254: v1(-21,23.675) -21,23.742 -20.775,23.967 -20.775,24.558 -20.6,24.733 v1(-20.6,24.8)
GND: AN400.GND AN401.1 AN401.3 C100.1 C101.1 C102.1 C103.1 C104.1 C105.1 C106.1 C107.1 C108.1 C109.1 C200.1 C201.1 C202.1 C400.1 C401.1 C402.1 C403.1 C404.1 C405.1 C406.1 C407.1 C409.2 C500.1 C501.1 C502.1 C503.1 C504.1 C505.1 DS201.K DS202.K DS203.K J11.1 R500.1 R501.1 R502.1 R504.1 S200.1 S201.1 S202.1 S203.1 S204.2 S205.2 U100.3 U100.13 U100.21 U101.1 U101.2 U101.3 U101.6 U101.7 U101.10 U101.11 U103.2 U400.49 U500.3 U500.5 U500.9 U501.2 U502.2 X100.5 X100.6 X100.7 X100.8 X100.9 X200.6 X200.10 X200.S X500.2 | length 24.5
  Top Layer w0.254: -24.8,26.175 -24.75,26.125 X100.6 ; X100.8 -24.725,20.976 -24.576,21.125 X100.7 X100.5 ; C104.1 C104.1@-19.763,26.213 ; v1(-19.25,33.725) -19.25,33.075 C109.1 -18.2,33.05 -17.9,33.35 -17.16,33.35 U101.7 ; v1@-18.937,26.213 v1(-18.925,26.225) ; C108.1@-18.796,35.804 C108.1 C108.1@-18.675,35.8 ; U101.6 U101.7 ; U101.3 U101.2 ; C107.1@-15.782,36.1 -15.975,35.907 U101.2 ; C107.1 C107.1@-15.737,36.113 ; U101.1 U101.2 ; C106.1@-15.323,22.402 C106.1 ; v1@-15.2,32.192 v1(-15.2,32.125) -15.247,32.172 -15.247,32.357 -15.475,32.585 U101.11 U101.10 -16.023,32.763 -16.023,33.064 -16.334,33.375 U101.7 ; v1@-14.937,36.113 v1(-14.925,36.125) ; C101.1@-14.441,21.559 C101.1 ; U100.13 -13.575,24.854 -13.427,24.706 -13.427,24.704 -12.998,24.275 v1(-12.975,24.275) ; C100.1@-11.907,24.396 C100.1 ; C200.1@-8.596,37.621 C200.1 ; S205.2@-6.62,36.47 S205.2 ; C201.1@-4.459,21.166 C201.1 C201.1@-4.377,21.166 ; C504.1 C504.1@-4.332,9.932 ; X200.S@-3.498,15.502 X200.S@-3.498,15.566 ; C202.1@-3.427,20.123 C202.1@-3.427,20.216 ; R504.1@-0.31,19.085 R504.1 ; R502.1 R502.1@-0.204,17.133 ; C407.1@0.042,34.78 C407.1 ; C505.1 C505.1@0.857,16.082 ; C406.1 C406.1@1.35,34.8 ; C502.1@1.4,8.875 C502.1 ; R500.1 R500.1@1.46,14.935 ; C409.2 C409.2@1.8,23.925 ; v1(1.775,27.775) 1.825,27.775 v1(2.6,28.55) ; v1(2.125,8.925) v1@2.125,8.992 ; U500.9@2.3,11.025 v1(2.325,11.05) ; U500.9@2.95,11.95 U500.9 ; C501.1 C501.1@4.65,7.7 ; C503.1 C503.1@5.95,7.7 ; v1(6.95,11.4) v1@6.962,11.388 ; U502.2@6.962,10.363 U502.2 ; R501.1@7.081,7.466 R501.1 ; S204.2 S204.2@8.37,18.695 ; C401.1 C401.1@8.538,31.538 ; C404.1 C404.1@8.55,32.8 ; C400.1@8.538,30.288 C400.1 C400.1@8.575,30.3 ; C402.1 8.625,24.3 v1(9.6,24.3) ; C403.1 8.65,25.5 v1(9.625,25.5) ; DS201.K DS201.K@13.275,40.55 ; J11.1@14.4,15.075 J11.1 J11.1@14.475,15 ; DS202.K@14.687,40.538 DS202.K ; DS203.K DS203.K@16.125,40.575 ; S203.1@18.214,13.438 S203.1 ; S200.1@19.724,31.655 S200.1 ; S202.1@20.646,19.336 S202.1 ; S201.1@21.108,25.585 S201.1
  other v1: -5.922,0.889 -2.922,0.889 -0.922,0.889 0.078,0.889 -10.922,1.889 -9.922,1.889 -8.922,1.889 -7.922,1.889 -6.922,1.889 -5.922,1.889 -4.922,1.889 -3.922,1.889 -0.922,1.889 2.078,1.889 3.078,1.889 -9.922,2.889 -8.922,2.889 -7.922,2.889 -6.922,2.889 -5.922,2.889 -1.922,2.889 11.078,2.889 12.078,2.889 -14.922,3.889 -13.922,3.889 -12.922,3.889 -10.922,3.889 -9.922,3.889 -8.922,3.889 -7.922,3.889 -6.922,3.889 -5.922,3.889 -4.922,3.889 -1.922,3.889 13.078,3.889 -15.922,4.889 -14.922,4.889 -13.922,4.889 -12.922,4.889 -11.922,4.889 -10.922,4.889 -9.922,4.889 -8.922,4.889 -7.922,4.889 14.078,4.889 15.078,4.889 -16.922,5.889 -15.922,5.889 -14.922,5.889 -13.922,5.889 -12.922,5.889 -11.922,5.889 -10.922,5.889 -9.922,5.889 -8.922,5.889 -4.922,5.889 -3.922,5.889 0.078,5.889 1.078,5.889 13.078,5.889 14.078,5.889 15.078,5.889 16.078,5.889 -18.922,6.889 -17.922,6.889 -16.922,6.889 -15.922,6.889 -14.922,6.889 -13.922,6.889 -12.922,6.889 -11.922,6.889 -10.922,6.889 -9.922,6.889 -8.922,6.889 -7.922,6.889 -3.922,6.889 -2.922,6.889 -0.922,6.889 0.078,6.889 16.078,6.889 17.078,6.889 4.65,7.025 5.95,7.025 -18.922,7.889 -17.922,7.889 -16.922,7.889 -15.922,7.889 -14.922,7.889 -13.922,7.889 -12.922,7.889 -11.922,7.889 -10.922,7.889 -9.922,7.889 -8.922,7.889 -7.922,7.889 -6.922,7.889 -5.922,7.889 -0.922,7.889 2.078,7.889 14.078,7.889 17.078,7.889 18.078,7.889 0.725,8.875 -19.922,8.889 -18.922,8.889 -17.922,8.889 -16.922,8.889 -15.922,8.889 -14.922,8.889 -13.922,8.889 -12.922,8.889 -11.922,8.889 -10.922,8.889 -9.922,8.889 -8.922,8.889 -7.922,8.889 -6.922,8.889 -5.922,8.889 -4.922,8.889 9.078,8.889 14.078,8.889 17.078,8.889 -20.922,9.889 -19.922,9.889 -18.922,9.889 -17.922,9.889 -16.922,9.889 -15.922,9.889 -14.922,9.889 -13.922,9.889 -12.922,9.889 -11.922,9.889 -10.922,9.889 -9.922,9.889 -8.922,9.889 -7.922,9.889 -6.922,9.889 -5.922,9.889 17.078,9.889 18.078,9.889 9.3,10.125 -20.922,10.889 -19.922,10.889 -18.922,10.889 -17.922,10.889 -16.922,10.889 -15.922,10.889 -14.922,10.889 -13.922,10.889 -12.922,10.889 -11.922,10.889 -10.922,10.889 -9.922,10.889 -8.922,10.889 -7.922,10.889 -6.922,10.889 -5.922,10.889 -4.922,10.889 -3.922,10.889 5.078,10.889 17.078,10.889 18.078,10.889 19.078,10.889 4.225,11.025 -19.922,11.889 -18.922,11.889 -17.922,11.889 -16.922,11.889 -15.922,11.889 -14.922,11.889 -13.922,11.889 -12.922,11.889 -11.922,11.889 -10.922,11.889 -9.922,11.889 -8.922,11.889 -7.922,11.889 -6.922,11.889 -5.922,11.889 -4.922,11.889 -3.922,11.889 5.078,11.889 2.325,12.2 4.225,12.2 -22.922,12.889 -19.922,12.889 -18.922,12.889 -17.922,12.889 -16.922,12.889 -15.922,12.889 -14.922,12.889 -13.922,12.889 -12.922,12.889 -11.922,12.889 -1.922,12.889 5.078,12.889 13.078,12.889 17.078,12.889 14.475,13.05 17.65,13.725 -22.922,13.889 -21.922,13.889 -19.922,13.889 -18.922,13.889 -17.922,13.889 -16.922,13.889 -15.922,13.889 -14.922,13.889 -13.922,13.889 -12.922,13.889 -9.922,13.889 -8.922,13.889 -7.922,13.889 -6.922,13.889 -5.922,13.889 -4.922,13.889 -3.922,13.889 -2.922,13.889 -1.922,13.889 20.078,13.889 -23.922,14.889 -22.922,14.889 -21.922,14.889 -20.922,14.889 -19.922,14.889 -17.922,14.889 -16.922,14.889 -15.922,14.889 -14.922,14.889 -13.922,14.889 -10.922,14.889 -9.922,14.889 -8.922,14.889 -7.922,14.889 -6.922,14.889 -5.922,14.889 -4.922,14.889 -2.922,14.889 -1.922,14.889 4.078,14.889 1.975,15.45 -23.922,15.889 -22.922,15.889 -21.922,15.889 -20.922,15.889 -19.922,15.889 -17.922,15.889 -16.922,15.889 -15.922,15.889 -14.922,15.889 -11.922,15.889 -10.922,15.889 -9.922,15.889 -8.922,15.889 -7.922,15.889 -6.922,15.889 -5.922,15.889 12.078,15.889 13.078,15.889 14.4,16.35 -23.922,16.889 -22.922,16.889 -21.922,16.889 -20.922,16.889 -19.922,16.889 -18.922,16.889 -17.922,16.889 -16.922,16.889 -15.922,16.889 -12.922,16.889 -11.922,16.889 -10.922,16.889 -9.922,16.889 -8.922,16.889 -7.922,16.889 -6.922,16.889 11.078,16.889 19.078,16.889 15.9,17.175 16.65,17.45 -24.922,17.889 -23.922,17.889 -22.922,17.889 -21.922,17.889 -20.922,17.889 -19.922,17.889 -18.922,17.889 -17.922,17.889 -16.922,17.889 -13.922,17.889 -12.922,17.889 -11.922,17.889 -10.922,17.889 -9.922,17.889 -8.922,17.889 -7.922,17.889 12.15,17.975 14.525,18.15 11.975,18.7 -24.922,18.889 -23.922,18.889 -22.922,18.889 -21.922,18.889 -20.922,18.889 -19.922,18.889 -18.922,18.889 -17.922,18.889 -13.922,18.889 -12.922,18.889 -11.922,18.889 -10.922,18.889 -9.922,18.889 -8.922,18.889 12.3,19.3 16.55,19.425 9.125,19.45 20,19.45 -0.85,19.625 12.925,19.625 15.725,19.675 -3.85,19.7 -22.922,19.889 -21.922,19.889 -20.922,19.889 -19.922,19.889 -18.922,19.889 -15.922,19.889 -12.922,19.889 -11.922,19.889 -10.922,19.889 -9.922,19.889 13.45,20.075 -4.925,20.7 13.6,20.7 -20.922,20.889 -19.922,20.889 -18.922,20.889 -16.922,20.889 -15.922,20.889 -12.922,20.889 -11.922,20.889 9.078,20.889 -14.9,21.1 -18.55,21.475 -19.75,21.5 -20.922,21.889 -3.922,21.889 20.078,21.889 -15.8,21.925 -3.922,22.889 11.078,22.889 20.078,22.889 17.078,23.889 2.475,23.925 10.078,24.889 22.078,24.889 -11.5,25.127 20.5,25.5 5.05,26.1 0.175,26.15 2.65,26.15 -13.575,26.475 -22.922,26.889 18.078,26.889 4.375,26.925 0.875,26.975 2.625,27.075 -14.325,27.225 -12.825,27.225 3.55,27.75 -22.922,27.889 -21.922,27.889 10.078,27.889 17.078,27.889 -13.575,27.975 4.133,28.535 5.075,28.55 0.125,28.575 1.3,28.575 -24.922,28.889 -23.922,28.889 -22.922,28.889 -21.922,28.889 9.078,28.889 10.078,28.889 13.078,28.889 14.078,28.889 15.078,28.889 16.078,28.889 -18.15,29.2 -19.425,29.325 1.75,29.475 3.45,29.475 -23.922,29.889 -22.922,29.889 -21.922,29.889 -5.922,29.889 10.078,29.889 13.078,29.889 14.078,29.889 15.078,29.889 -13.575,30.225 2.6,30.225 1.025,30.3 9.25,30.3 -20.922,30.889 -13.922,30.889 -12.922,30.889 -11.922,30.889 -10.922,30.889 10.078,30.889 13.078,30.889 14.078,30.889 15.078,30.889 0.15,31.025 19.175,31.375 9.25,31.55 -20.922,31.889 10.078,31.889 13.078,31.889 14.078,31.889 18.078,31.889 9.25,32.8 -21.922,32.889 -20.922,32.889 -11.922,32.889 -10.922,32.889 -9.922,32.889 -8.922,32.889 18.078,32.889 -22.922,33.889 -21.922,33.889 -20.922,33.889 6.078,33.889 -0.704,34.779 -1.275,34.875 -22.922,34.889 -21.922,34.889 -20.922,34.889 -2.922,34.889 6.078,34.889 7.078,34.889 -1.8,35.125 -2.179,35.529 -21.922,35.889 -20.922,35.889 -4.922,35.889 -3.922,35.889 5.078,35.889 6.078,35.889 7.078,35.889 8.078,35.889 9.078,35.889 10.078,35.889 11.078,35.889 12.078,35.889 -2.479,36.029 4.25,36.225 -0.425,36.275 -18.796,36.471 -2.55,36.6 -0.825,36.725 -21.922,36.889 -20.922,36.889 -10.922,36.889 -4.922,36.889 -3.922,36.889 5.078,36.889 6.078,36.889 7.078,36.889 8.078,36.889 9.078,36.889 10.078,36.889 11.078,36.889 12.078,36.889 -0.225,37.05 4.3,37.075 -2.529,37.204 -7.375,37.225 -0.879,37.304 -0.218,37.713 4.282,37.713 -2.529,37.779 -0.875,37.875 -20.922,37.889 -19.922,37.889 -6.922,37.889 -5.922,37.889 -3.922,37.889 5.078,37.889 6.078,37.889 7.078,37.889 8.078,37.889 9.078,37.889 10.078,37.889 11.078,37.889 12.078,37.889 18.078,37.889 -8.596,38.271 -5.375,38.3 -4.825,38.3 -3.175,38.325 -2.625,38.325 -19,38.4 -18.1,38.6 -9.15,38.625 -17.25,38.65 -16.35,38.65 -15.5,38.65 -14.675,38.65 -13.875,38.65 -13.05,38.65 -12.2,38.65 -11.35,38.65 -10.6,38.65 -9.825,38.675 12.175,39.3 17.078,39.889 12.175,40.225 17.078,40.889 12.35,41.05 13.275,41.225 14.7,41.25 16.125,41.25
I2S_BCLK: MK300.4 U300.16 U400.34 | length 43.8
  Top Layer w0.2: U400.34 4.35,19.25 8.95,14.65 9.4,14.65 v1(10.475,13.575) 10.475,8.075 10.15,7.75 10.15,4.329 9.876,4.055 8.143,3.491 MK300.4 MK300.4@8.149,3.471 ; U300.16 16.513,22.788 17.762,22.788 v1(17.775,22.775)
  Bottom Layer w0.2: v1(10.475,13.575) 16.1,13.575 18.2,15.675 18.2,22.35 v1(17.775,22.775) v1@17.775,22.697
I2S_DIN: U300.1 U400.39 | length 14.7
  Top Layer w0.2: U400.39 11.75,26.8 12.4,27.45 15.675,27.45 16.5,26.625 16.5,25.05 15.75,24.3 U300.1
I2S_DOUT: MK300.6 R305.2 U400.42 | length 30
  Top Layer w0.254: U400.42 v1(6.575,28.3) ; v1(6.55,23.375) 6.55,18.675 11.1,14.125 v1(11.1,8.65) 11.117,8.633 12.164,8.633 R305.2 ; MK300.6 6.879,4.479 v1(7.2,4.8)
  Bottom Layer w0.254: v1(6.55,23.375) 6.55,28.275 v1(6.575,28.3) ; v1(7.2,4.8) 7.225,4.8 11.075,8.65 v1(11.1,8.65)
I2S_LRCLK: MK300.1 U300.14 U400.16 | length 49.9
  Top Layer w0.2: v1(-1.95,24.35) -1.95,24.275 1.525,20.8 2.075,20.8 9.569,13.306 9.793,13.306 v1(9.85,13.248) 9.85,13.192 10.061,12.981 10.061,8.561 9.225,7.725 v1(9.175,7.725) ; v1(-1.95,29.8) U400.16 ; MK300.1 6.023,4.523 v1(6.725,5.225) ; U300.14 16.513,21.788 17.287,21.788 v1(17.3,21.775)
  Bottom Layer w0.2: v1(-1.95,24.35) v1(-1.95,29.8) ; v1(6.725,5.225) 6.725,5.25 9.175,7.7 v1(9.175,7.725) ; v1(9.85,13.248) 9.907,13.306 9.907,13.644 10.839,14.575 15.6,14.575 17.3,16.275 v1(17.3,21.775)
MISO: R213.1 U400.22 X200.7 | length 12.9
  Top Layer w0.254: X200.7 -9.507,21.087 -8.685,21.909 R213.1 -8.634,21.942 -7.917,21.225 v1(-7.875,21.225) ; v1@-6.65,24.175 -4.025,26.8 U400.22
  Bottom Layer w0.254: v1(-7.875,21.225) -6.65,22.45 v1(-6.65,24.175)
MOSI: R211.1 U400.21 X200.3 | length 16.4
  Top Layer w0.254: X200.3 -5.362,19 -5.1,19 -3.918,17.818 -3.362,17.818 R211.1 -3.26,17.752 v1(-2.7,18.313) ; v1(-3.1,27.325) -3.077,27.302 -0.627,27.302 U400.21
  Bottom Layer w0.254: v1(-3.1,27.325) -3.1,18.779 -2.7,18.379 v1(-2.7,18.313)
NetAN400_ANT1: AN400.ANT1 C408.2 | length 1.1
  Top Layer w0.508: AN400.ANT1 -1.707,38.866 -1.707,37.741 -1.706,37.74 C408.2
NetAN400_ANT2: AN400.ANT2 AN401.2 | length 2.8
  Top Layer w0.254: AN400.ANT2 2.031,38.862 AN401.2
NetC102_2: C102.2 F100.1 U103.1 X100.1 | length 5.8
  Top Layer w0.254: X100.1 -21.55,24.925 -21.048,25.427 -21.048,27.018 -20.825,27.241 F100.1 -20.69,27.246 -19.429,27.246 C102.2 -19.4,27.275 -18.175,27.275 U103.1
NetC105_2: C105.2 U100.10 | length 4.9
  Top Layer w0.254: C105.2 -16.55,22.3 -15.625,23.225 U100.10
NetC200_2: C200.2 Q100.6 R209.1 S205.1 U400.9 | length 24.7
  Top Layer w0.254: R209.1 -9.89,36.146 -8.629,36.146 C200.2 -7.854,36.2 -6.795,35.141 -5.272,35.141 S205.1 -3.702,33.854 v1(-1.629,33.854) v1@-1.625,33.85 ; Q100.6@-8.642,27.73 Q100.6 -8.268,27.507 -7.3,28.475 v1(-6.4,28.475) ; v1(1.196,32.69) 1.196,32.623 1.348,32.471 1.348,31.777 U400.9
  Bottom Layer w0.254: v1(-6.4,28.475) -5.45,28.475 -2.425,31.5 -2.425,33.058 v1(-1.629,33.854) 0.111,33.854 1.067,32.898 1.067,32.885 1.196,32.756 v1(1.196,32.69)
NetC409_1: C409.1 U400.26 | length 1.4
  Top Layer w0.254: U400.26 0.352,25.323 0.352,23.923 C409.1
NetC503_2: C503.2 U500.7 U502.1 | length 5.6
  Top Layer w0.254: U500.7 3.6,9.064 4.239,8.425 5.825,8.425 5.925,8.525 C503.2 6.025,9.225 U502.1
NetDS201_A: DS201.A R204.1 | length 0.9
  Top Layer w0.2: R204.1 13.244,39.119 DS201.A
NetDS202_A: DS202.A R205.1 | length 0.9
  Top Layer w0.254: DS202.A 14.7,38.278 R205.1
NetDS203_A: DS203.A R206.1 | length 0.9
  Top Layer w0.254: R206.1 16.1,38.265 DS203.A
NetMK300_2: MK300.2 R303.1 R304.2 | length 2.6
  Top Layer w0.254: R304.2@4.701,2.481 5.89,2.481 6.168,2.759 MK300.2 ; R304.2 R303.1
NetQ100_1: Q100.1 R103.1 U100.19 | length 6.6
  Top Layer w0.254: U100.19 -11.523,27.727 -10.923,27.727 -9.966,28.684 v1(-8.75,28.684) -8.737,28.697 -8.737,29.37 -8.75,29.382 Q100.1 ; R103.1 -7.783,26.321 v1@-7.783,27.267
  Bottom Layer w0.254: v1(-8.75,28.684) v1(-7.775,27.275)
NetQ100_2: Q100.2 R102.2 | length 1.2
  Top Layer w0.254: Q100.2 -9.358,29.424 -9.358,30.596 R102.2
NetQ100_3: Q100.3 R207.1 R213.2 S204.1 U400.23 | length 33.1
  Top Layer w0.2: v1(-10.813,28.738) -10.351,29.2 -10.092,29.2 -10.025,29.267 Q100.3 Q100.3@-10,29.432 ; v1(-8.625,23.3) -8.258,23.667 -8.092,23.667 -7.604,23.179 R213.2 ; R213.2@-7.675,23.576 -7.675,23.384 -7.333,23.042 -7.141,23.042 -4.216,25.966 ; U400.23 -3.882,26.3 -4.216,25.966 ; S204.1 5.613,16.137 -4.216,25.966
  Bottom Layer w0.2: v1(-10.813,28.738) -10.813,23.963 -9.675,22.825 -9.1,22.825 v1(-8.625,23.3)
NetQ100_4: Q100.4 R102.1 U100.18 | length 6.6
  Top Layer w0.254: U100.18 -10.725,27.225 -10.5,27.45 -10.082,27.45 Q100.4 -9.942,27.59 -9.942,28.058 -9.793,28.207 -8.15,28.207 -7.741,28.616 R102.1
NetQ100_5: Q100.5 R103.2 | length 1.2
  Top Layer w0.254: R103.2 -9.383,26.321 -9.383,27.499 Q100.5
NetR106_1: R106.1 U101.4 U400.12 | length 20.6
  Top Layer w0.2: U101.4 -16.975,35.872 R106.1 -16.994,36.606 -16.825,36.775 -13.3,36.775 -11.475,34.95 -7.95,34.95 -5.098,32.098 -2.998,32.098 -2.675,31.775 U400.12
NetR107_1: R107.1 U101.9 U400.13 | length 17.4
  Top Layer w0.254: U101.9 -16.483,32.707 R107.1@-16.483,31.639 ; R107.1@-16.46,31.663 R107.1@-16.483,31.639 ; v1(-11.342,31.975) -11.686,31.631 R107.1 R107.1@-16.483,31.639 ; v1(-4.075,31.648) -4.06,31.663 -3.188,31.663 -2.825,31.3 U400.13
  Bottom Layer w0.254: v1(-11.342,31.975) -4.469,31.975 -4.142,31.648 v1(-4.075,31.648)
NetR200_1: R200.1 S200.2 U400.5 | length 22.6
  Top Layer w0.2: U400.5 3.35,31.98 3.516,32.147 3.516,32.179 3.662,32.325 3.8,32.325 4,32.525 4,32.919 3.85,33.069 v1(3.85,33.15) ; v1(17.5,33.625) 18.069,33.625 18.757,34.313 S200.2 18.757,34.317 18.335,34.334 17.751,35.181 R200.1
  Bottom Layer w0.2: v1(3.85,33.15) 3.875,33.125 3.875,31.545 4.345,31.075 5.125,31.075 8.5,34.45 16.675,34.45 v1(17.5,33.625)
NetR201_1: R201.1 S201.2 U400.6 | length 27.7
  Top Layer w0.2: U400.6 2.85,31.98 3.025,32.155 3.025,32.214 3.25,32.439 3.25,32.469 3.425,32.644 v1(3.425,32.725) ; v1(17,32.775) 16.975,32.75 16.975,31.175 19.724,28.426 S201.2 20.692,28.616 20.545,29.662 R201.1
  Bottom Layer w0.2: v1@3.45,32.7 v1(3.425,32.725) 3.425,31.4 4.1,30.725 5.207,30.725 8.632,34.15 16.325,34.15 17,33.475 v1(17,32.775)
NetR202_1: R202.1 S202.2 U400.7 | length 32.3
  Top Layer w0.2: U400.7@2.373,31.798 U400.7 2.35,31.98 2.485,32.115 2.485,32.254 2.825,32.594 v1(2.825,32.675) ; v1(16.4,32.375) 16.4,30.775 19.775,27.4 19.775,24.25 20.181,23.844 R202.1 21.335,23.444 21.151,22.36 S202.2
  Bottom Layer w0.2: v1(2.825,32.675) 2.825,31.525 3.925,30.425 5.4,30.425 8.8,33.825 15.95,33.825 16.4,33.375 v1(16.4,32.375) v1@16.375,32.35
NetR203_1: R203.1 S203.2 U400.8 | length 37.3
  Top Layer w0.2: U400.8 1.85,32.3 v1(2.225,32.675) ; v1(15.875,31.875) 15.875,30.3 19.35,26.825 19.35,18.758 20.389,17.719 R203.1 20.177,17.274 19.63,16.201 S203.2
  Bottom Layer w0.2: v1(2.225,32.675) 2.225,31.625 3.725,30.125 5.6,30.125 8.975,33.5 15.375,33.5 15.875,33 v1(15.875,31.875)
NetR204_2: R204.2 U400.24 | length 29
  Top Layer w0.2: U400.24 -0.625,23.625 1.05,21.95 v1(3.6,21.95) ; v1(7.375,21.95) 9,21.95 11.05,24 v1(11.05,25.65) ; v1(11.05,27.725) 11.05,32 13.244,34.194 R204.2
  Bottom Layer w0.2: v1(3.6,21.95) v1(7.375,21.95) ; v1(11.05,25.65) v1(11.05,27.725)
NetR205_2: R205.2 U400.27 | length 26.8
  Top Layer w0.2: U400.27 0.85,24.51 1.05,24.31 1.05,23.392 1.892,22.55 v1(3.6,22.55) ; v1(7.35,22.55) 8.95,22.55 10.525,24.125 v1(10.525,24.2) ; v1(11.65,28.2) 11.65,32.05 14.719,35.119 R205.2
  Bottom Layer w0.2: v1(3.6,22.55) v1(7.35,22.55) ; v1(10.525,24.2) 11.65,25.325 v1(11.65,28.2)
NetR206_2: R206.2 U400.38 | length 18.4
  Top Layer w0.2: U400.38 5.837,26.287 12.213,26.287 v1(12.225,26.275) ; v1(12.225,28.65) 12.225,32.075 16.075,35.925 16.075,36.64 R206.2
  Bottom Layer w0.2: v1(12.225,26.275) v1(12.225,28.65)
NetR208_1: R208.1 U400.10 X200.9 | length 18.3
  Top Layer w0.254: X200.9 -11.018,22.472 -10.174,23.317 -10.174,23.501 v1(-9.7,23.975) ; v1(-6.725,26.375) v1(-5.5,27.6) ; v1(0.59,32.7) 0.637,32.653 0.637,32.574 0.85,32.361 U400.10
  Bottom Layer w0.254: v1(-9.7,23.975) -7.347,26.328 -6.772,26.328 v1(-6.725,26.375) ; v1(-5.5,27.6) -1.95,31.15 -1.95,32.55 -1.2,33.3 -0.01,33.3 v1(0.59,32.7)
NetR300_1: R300.1 R302.2 U300.2 | length 2.9
  Top Layer w0.2: R300.1 R302.2 15.464,25.196 15.464,24.539 15.25,24.325 U300.2
NetR301_1: R301.1 U300.4 | length 4
  Top Layer w0.254: U300.4 14.25,24.35 13.95,24.65 13.95,26.45 14.131,26.631 R301.1
NetR500_2: R500.2 U500.4 | length 2.2
  Top Layer w0.254: R500.2 1.008,13.075 U500.4
NetR502_2: R502.2 U501.5 | length 3.7
  Top Layer w0.254: R502.2 -1.194,15.852 -1.194,13.473 -0.809,13.088 -0.809,12.733 U501.5
NetR503_1: R503.1 R504.2 U400.11 | length 19.2
  Top Layer w0.254: v1(-1.439,20.836) -1.439,19.191 -0.151,17.903 0.795,17.903 R504.2 0.934,18.004 1.529,17.41 R503.1 ; v1(-0.475,32.525) -0.428,32.478 0.022,32.478 0.35,32.15 U400.11
  Bottom Layer w0.254: v1(-1.439,20.836) -1.439,32.086 -1.047,32.478 -0.522,32.478 v1(-0.475,32.525)
OUTN: Speaker.2 U300.10 | length 2.6
  Top Layer w0.254: U300.10 14.75,19.437 Speaker.2
OUTP: Speaker.1 U300.9 | length 2.6